# Altium PCB PCB1.PcbDoc
Units mil, origin at the board's own origin, x right, y up, seen from the top; angles counter-clockwise.
Board outline 5620.78 x 2570.78 mil, 2 copper layers (Top Layer, Bottom Layer), stack 21 mil thick; 57 components, 27 nets, 131 pads, 33 vias.
Unrouted connection lines stored in the file: 11.
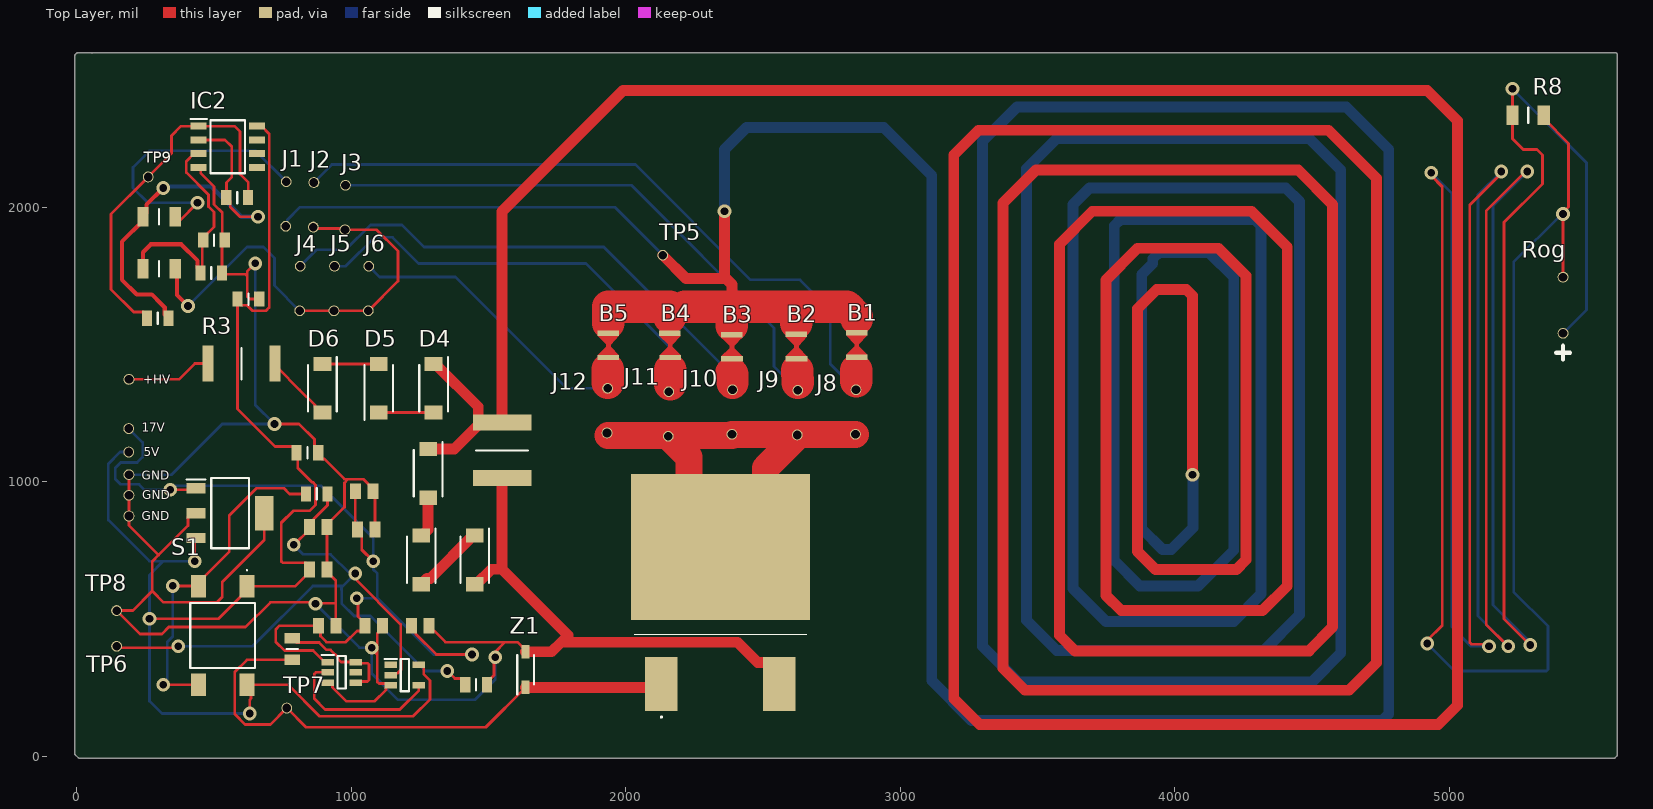
[diagram p0: Top Layer view]
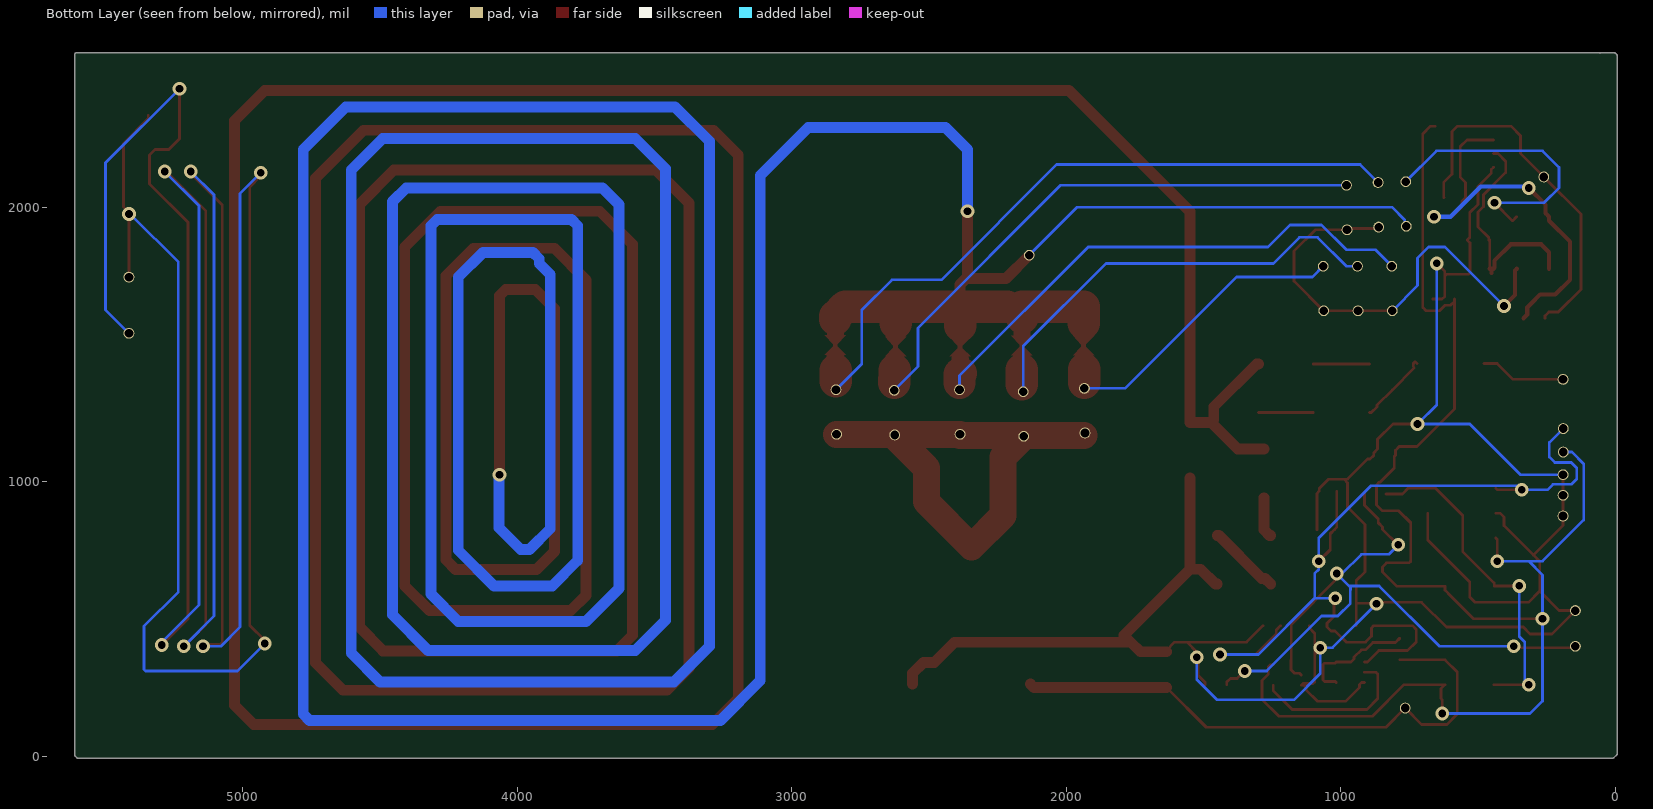
[diagram p1: Bottom Layer view, seen from below]
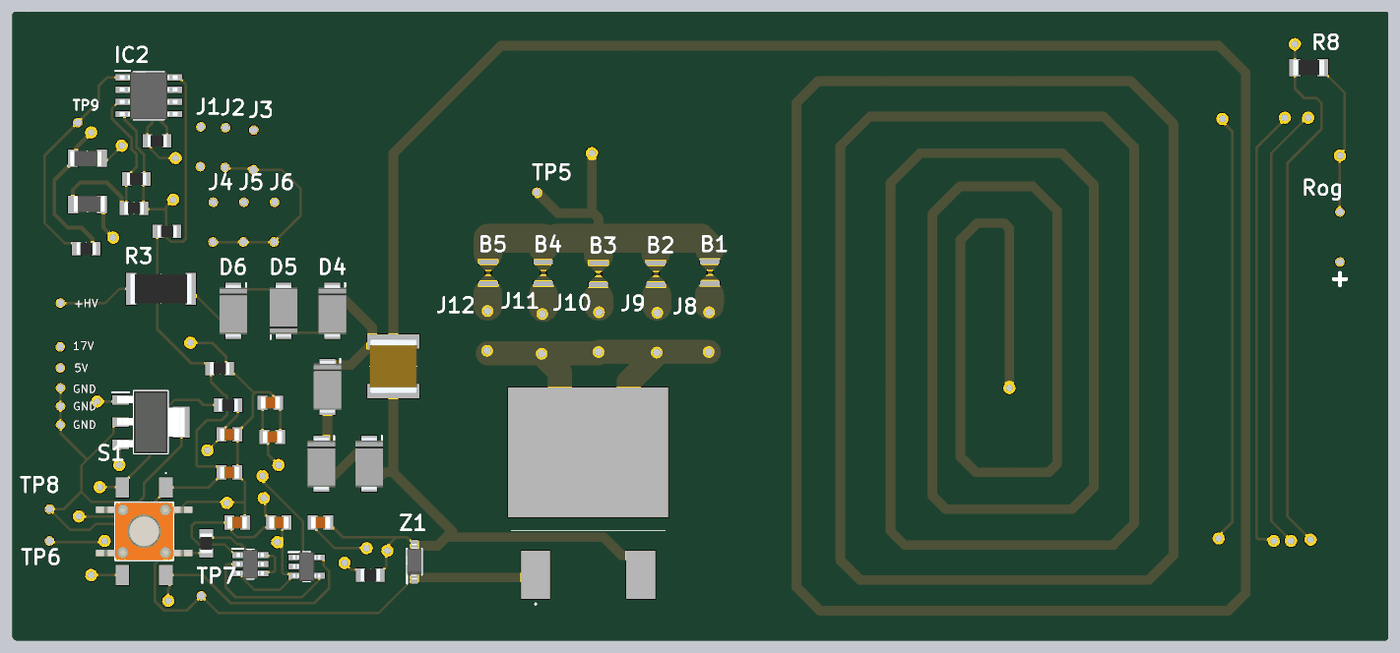
[diagram p2: 3D render of the assembled board from above, using the file's embedded part models]

## Layer stack, top to bottom
Top Solder: solder mask 0.4, Solder Resist, Dk 3.5
Top Layer: signal copper 1.4
Dielectric 2: prepreg 2.8, PP-006, Dk 4.1
Dielectric 1: dielectric 12.6, FR-4, Dk 4.8
Dielectric 3: prepreg 2.8, PP-006, Dk 4.1
Bottom Layer: signal copper 1.4
Bottom Solder: solder mask 0.4, Solder Resist, Dk 3.5

## Board outline
-5.58,4.42 cw(c0,10) -7.89,10 -7.89,2550 cw(c0,2550) -5.58,2555.58 -0.58,2560.58 cw(c5,2555) 5,2562.89 50,2562.89 cw(c50,2555) 55,2561.1 cw(c60,2555) 60,2562.89 5605,2562.89 cw(c5605,2555) 5612.89,2555 5612.89,5 cw(c5605,5) 5610.58,-0.58 5605.58,-5.58 cw(c5600,0) 5600,-7.89 10,-7.89 cw(c10,0) 4.42,-5.58

## Design rules (kind name [scope] priority, off if disabled: settings)
Clearance [All] p1: gap=10 ignorepadtopadclearanceinfootprint=FALSE except(0: Arc-Hole Track-Hole SMDPad-Hole THPad-Hole Via-Hole Fill-Hole Poly-Hole Region-Hole Text-Hole)
PolygonConnect [All] p1: connectstyle=Relief reliefconductorwidth=10 reliefentries=4 polygonreliefangle="90 Angle" airgapwidth=10
RoutingVias [All] p1: holewidth=28 width=50 viastyle="Through Hole" minholewidth=28 minwidth=50 maxholewidth=28 maxwidth=50
SolderMaskExpansion [All] p1: expansion=4 istentingtop=FALSE
Width [All] p1: maxlimit=157.48 minlimit=5.91 preferedwidth=10 minimp=50.000000 maximp=50.000000 favimp=50.000000
30 further rules are at their usual default settings.

## Classes and differential pairs
component class Sheet1: B1 B2 B3 B4 B5 D4 D5 D6 IC2 J1 J2 J3 J4 J5 J6 J8 J9 J10 J11 J12 R3 R8 S1 TP5 TP6 TP7 TP8 TP9 Z1

## Components (designator, comment, footprint, x,y, rotation, side; value= is the part's Value field where it differs from the comment)
B1 "200um_400um_35um" Bridge_2 2841.97,1496.34 r270 top
B2 "200um_400um_35um" Bridge_2 2621.97,1491.34 r270 top
B3 "200um_400um_35um" Bridge_2 2386.97,1490.28 r270 top
B4 "200um_400um_35um" Bridge_2 2161.97,1495.28 r270 top
B5 "200um_400um_35um" Bridge_2 1936.97,1495.28 r270 top
C1 "C0805C105J4RAC7210" RESC2012X60N 295,1595 r0 top
C2 "C0805C105J4RAC7210" RESC2012X60N 500,1880 r0 top
C3 "80-C2220X164KFRLCAUTO" CAPC5750X280N 1549.25,1113.82 r270 top
C4 "C0805C105J4RAC7210" RESC2012X60N 840,1105 r0 top
C5 "KAM21BR71H104JT" CAPC2012X94N 880,835 r0 top
C6 "C0805C105J4RAC7210" RESC2012X60N 625,1665 r0 top
C7 "KAM21BR71H104JT" CAPC2012X94N 1081.69,475 r0 top
C8 "KAM21BR71H104JT" CAPC2012X94N 1251.69,475 r0 top
C9 "KAM21BR71H104JT" CAPC2012X94N 911.69,475 r0 top
C10 "KAM21BR71H104JT" CAPC2012X94N 880,680 r0 top
C11 "KAM21BR71H104JT" CAPC2012X94N 1055,825 r0 top
C12 "KAM21BR71H104JT" CAPC2012X94N 1046.69,965 r0 top
D1 "AES2JF-HF" SODFL5226X110N 1450,715 r270 top
D2 "AES2JF-HF" SODFL5226X110N 1255,715 r270 top
D3 "AES2JF-HF" SODFL5226X110N 1280,1030 r270 top
D4 "AES2JF-HF" SODFL5226X110N 1300,1340 r270 top
D5 "AES2JF-HF" SODFL5226X110N 1100,1340 r90 top
D6 "AES2JF-HF" SODFL5226X110N 895,1340 r270 top
IC1 "ZXGD3005E6TA" SOT95P285X140-6N 965,305 r0 top
IC2 "AS2333S-13" SOIC127P600X150-8N 550,2220 r0 top
IC3 "74LVC1G17QW5-7" SOT95P285X140-5N 1195,295 r0 top
IC4 "UA78M05CDCYG3" SOT230P700X180-4N 559.02,885 r0 top
J1 "Jumper" Jumper 765,2015 r90 top
J2 "Jumper" Jumper 860,2005 r270 top
J3 "Jumper" Jumper 975,1995 r270 top
J4 "Jumper" Jumper 810,1700 r270 top
J5 "Jumper" Jumper 935,1700 r270 top
J6 "Jumper" Jumper 1060,1700 r270 top (schematic designator J7)
J8 "Jumper" Jumper 2835,1250 r270 top
J9 "Jumper" Jumper 2623.03,1247.76 r270 top
J10 "Jumper" Jumper 2385,1250 r270 top
J11 "Jumper" Jumper 2153.03,1242.76 r270 top
J12 "Jumper" Jumper 1930,1255 r270 top
P1 "Power Input" "Power Input" 190.98,1370.47 r0 top
Q1 "IXGT32N170-TRL" IXGT32N170TRL 2345,640 r0 top
R1 "RNCF0805BTE500K" RESC2012X60N 490,1760 r0 top
R2 "RNCF0805BTE500K" RESC2012X60N 584.37,2035 r180 top
R3 "HV733ATTE4702F" RESC6331X70N 600,1430 r0 top
R4 "ERJ-S06J3R0V" RESC2012X60N 785,390 r270 top
R5 "RNCE1206BTE49R9" RESC3216X60N 300,1775 r0 top
R6 "RNCE1206BTE49R9" RESC3216X60N 300,1965 r180 top
R7 "RNCF0805BTE500K" RESC2012X60N 874.37,955 r0 top
R8 "CRMA2010AF680RFKEF" RESC3216X65N 5287.91,2335 r0 top
R9 "RC0805FR-075M9L" RESC2012X60N 1455,260 r0 top
Rog "Rogowski" Rogowski 5415,1745.98 r0 top (schematic designator Rog1)
S1 "2-1977223-4" 219772234 531.42,439.13 r90 top
TP5 "Test_Point" TestPoint 2135,1825 r90 top
TP6 "Test_Point" TestPoint 145,400 r90 top
TP7 "Test_Point" TestPoint 765,175 r90 top
TP8 "Test_Point" TestPoint 145,530 r90 top
TP9 "Test_Point" TestPoint 260,2110 r90 top
Z1 "MMSZ4705-HE3_A-08" SOD3716X135N 1635,315 r90 top

## Footprints (in the part's own frame and the unit in brackets; to place one, negate y for a bottom-side part, rotate by r counter-clockwise, add the part's x,y. Pads: shape width x height; smd on the part's side, far side on the other; paste and mask are expansions set on the pad)
219772234 [mm]
  rect 2.1x1.4 smd: 1(4.55,-2.25) 2(-4.55,-2.25) 3(4.55,2.25) 4(-4.55,2.25)
  silkscreen extent -3,-3 6.1,3, body extent -3,-5 3,5, height 9.51
Bridge_2 [mm] "200umL_400umW_35umT"
  rect 0.5x2 smd: 1(-1.15,-0.025) 2(1.1,0)
  Top Layer region: 0.1,0.2 0.1,-0.2 -0.1,-0.2 -0.1,0.2
  Top Layer region: -0.1,0.2 -0.1,-0.2 -0.125,-0.2 -0.925,-1 -0.925,0.962
  Top Layer region: 0.1,-0.2 0.1,0.2 0.875,0.975 0.875,-0.975
CAPC2012X94N [mm]
  rect 1.02x1.47 smd: 1(-0.81,0) 2(0.81,0)
  body extent -1,-0.63 1,0.63, height 1.41
CAPC5750X280N [mm]
  rect 1.47x5.41 smd: 1(-2.57,0) 2(2.57,0)
  silkscreen extent 0,-2.4 0,2.4, body extent -2.85,-2.5 2.85,2.5, height 2.8
IXGT32N170TRL [mm]
  rect 3x5 smd: 1(-5.46,-9.6) 3(5.46,-9.6)
  rect 16.59x13.49 smd: 2(0,3.1)
  silkscreen extent -7.98,-12.7 7.98,-5
Jumper [mm]
  round 1 hole 0.8: 1(-2.15,0.1) 2(1.975,0.05)
"Power Input" [mm]
  round 1 hole 0.8: 1(-0.025,0.05) 2(-0.05,-4.5) 3(-0.05,-6.675) 4(-0.025,-8.775) 5(-0.025,-10.675) 6(-0.025,-12.6)
RESC2012X60N [mm]
  rect 0.95x1.4 smd: 1(-1,0) 2(1,0)
  silkscreen extent 0,-0.53 0,0.53, body extent -1,-0.63 1,0.63, height 0.6
RESC3216X60N [mm] "3216 (mm) resistor footprint"
  rect 1.05x1.8 smd: 1(-1.5,0) 2(1.5,0)
  silkscreen extent 0,-0.7 0,0.7, body extent -1.42,-0.74 1.78,0.86, height 0.55
RESC3216X65N [mm]
  rect 1.15x1.8 smd: 1(-1.45,0) 2(1.45,0)
  silkscreen extent 0,-0.7 0,0.7, body extent -1.6,-0.8 1.6,0.8, height 0.65
RESC6331X70N [mm]
  rect 1.05x3.3 smd: 1(-3.1,0) 2(3.1,0)
  silkscreen extent 0,-1.45 0,1.45, body extent -3.15,-1.55 3.15,1.55, height 0.7
Rogowski [mm]
  round 1 hole 0.8: 1(0,-0.025) 2(0,-5.225)
SOD3716X135N [mm]
  rect 1.25x0.75 smd: 1(-1.65,0) 2(1.65,0)
  silkscreen extent -2.27,-0.77 1.35,0.77, body extent -1.85,-0.77 1.85,0.77, height 1.35
SODFL5226X110N [mm]
  rect 1.32x1.64 smd: 1(-2.25,0) 2(2.25,0)
  silkscreen extent -2.91,-1.33 2.15,1.33, body extent -2.7,-1.43 2.7,1.43, height 1.1
SOIC127P600X150-8N [mm]
  rect 1.5x0.65 smd: 1(-2.7,1.905) 2(-2.7,0.635) 3(-2.7,-0.635) 4(-2.7,-1.905) 5(2.7,-1.905) 6(2.7,-0.635) 7(2.7,0.635) 8(2.7,1.905)
  silkscreen extent -3.45,-2.45 1.6,2.58, body extent -3,-2.45 3,2.45, height 1.5
SOT95P285X140-5N [mm]
  rect 1.15x0.6 smd: 1(-1.3,0.95) 2(-1.3,0) 3(-1.3,-0.95) 4(1.3,-0.95) 5(1.3,0.95)
  silkscreen extent -1.88,-1.5 0.38,1.5, body extent -1.43,-1.5 1.43,1.5, height 1.4
SOT95P285X140-6N [mm]
  rect 1.15x0.6 smd: 1(-1.3,0.95) 2(-1.3,0) 3(-1.3,-0.95) 4(1.3,-0.95) 5(1.3,0) 6(1.3,0.95)
  silkscreen extent -1.88,-1.5 0.38,1.6, body extent -1.43,-1.5 1.43,1.5, height 1.4
SOT230P700X180-4N [mm]
  rect 1.75x0.95 smd: 1(-3.15,2.3) 2(-3.15,0) 3(-3.15,-2.3)
  rect 1.75x3.2 smd: 4(3.15,0)
  silkscreen extent -4.03,-3.25 1.75,3.25, body extent -3.5,-3.25 3.5,3.25, height 1.68
TestPoint [mm]
  round 1 hole 0.8: 1(0,0)

## Part data
B1 B2 B3 B4 B5: library part Bridge_2
C1 C2 C4 C6: library part "1u 10V", "0805 Ceramic"
C3: "0.16uF / 1500V"
C5 C7 C8 C9 C10 C11 C12: "Capacitor", Manufacturer_Name="Kyocera AVX", Mouser Part Number=581-KAM21BR71H104JT, Arrow Part Number=KAM21BR71H104JT, Arrow Price/Stock=https://www.arrow.com/en/products/kam21br71h104jt/avx?utm_currency=USD&region=nac, Datasheet Link=https://spicat.kyocera-avx.com/product/mlcc/chartview/KAM21BR71H104JT/DataSheet/X7R, Height=0.94mm, Manufacturer_Part_Number=KAM21BR71H104JT, Mouser Price/Stock=https://www.mouser.co.uk/ProductDetail/KYOCERA-AVX/KAM21BR71H104JT?qs=Jm2GQyTW%2Fbic6Zk4McEt6w%3D%3D
D1 D2 D3 D4 D5 D6: "Diode", Manufacturer_Name="Comchip Technology", Mouser Part Number=750-AES2JF-HF, Arrow Part Number=AES2JF-HF, Arrow Price/Stock=https://www.arrow.com/en/products/aes2jf-hf/comchip-technology?region=nac, Datasheet Link=https://www.comchiptech.com/admin/files/product/20190826114642.PDF, Height=1.1mm, Manufacturer_Part_Number=AES2JF-HF, Mouser Price/Stock=https://www.mouser.co.uk/ProductDetail/Comchip-Technology/AES2JF-HF?qs=GBLSl2Akirug3Evn59Vm1Q%3D%3D
IC1: "Integrated Circuit", Manufacturer_Name="Diodes Incorporated", Mouser Part Number=522-ZXGD3005E6TA, Arrow Part Number=ZXGD3005E6TA, Arrow Price/Stock=https://www.arrow.com/en/products/zxgd3005e6ta/diodes-incorporated?region=nac, Datasheet Link=https://www.diodes.com//assets/Datasheets/ZXGD3005E6.pdf, Height=1.4mm, Manufacturer_Part_Number=ZXGD3005E6TA, Mouser Price/Stock=https://www.mouser.co.uk/ProductDetail/Diodes-Incorporated/ZXGD3005E6TA?qs=mM5ZU9tM8NelwnPGVh4qtQ%3D%3D
IC2: "Integrated Circuit", Manufacturer_Name="Diodes Incorporated", Mouser Part Number=621-AS2333S-13, Arrow Part Number=AS2333S-13, Arrow Price/Stock=https://www.arrow.com/en/products/as2333s-13/diodes-incorporated?utm_currency=USD&region=nac, Datasheet Link=https://www.diodes.com/assets/Datasheets/AS2333.pdf, Height=1.5mm, Manufacturer_Part_Number=AS2333S-13, Mouser Price/Stock=https://www.mouser.co.uk/ProductDetail/Diodes-Incorporated/AS2333S-13?qs=sPbYRqrBIVls8seEy2CWjg%3D%3D
IC3: "Integrated Circuit", Manufacturer_Name="Diodes Incorporated", Mouser Part Number=621-74LVC1G17QW5-7, Arrow Part Number=74LVC1G17QW5-7, Arrow Price/Stock=https://www.arrow.com/en/products/74lvc1g17qw5-7/diodes-incorporated?region=europe, Datasheet Link=https://www.diodes.com//assets/Datasheets/74LVC1G17Q.pdf, Height=1.4mm, Manufacturer_Part_Number=74LVC1G17QW5-7, Mouser Price/Stock=https://www.mouser.co.uk/ProductDetail/Diodes-Incorporated/74LVC1G17QW5-7?qs=sPbYRqrBIVng3b7ZXxamXA%3D%3D
IC4: "Integrated Circuit", Manufacturer_Name="Texas Instruments", Mouser Part Number=595-UA78M05CDCYG3, Arrow Part Number=UA78M05CDCYG3, Arrow Price/Stock=https://www.arrow.com/en/products/ua78m05cdcyg3/texas-instruments, Datasheet Link=https://www.ti.com/lit/ds/symlink/ua78m.pdf?ts=1600084265750&ref_url=https%253A%252F%252Fwww.google.com%252F, Height=1.8mm, Manufacturer_Part_Number=UA78M05CDCYG3, Mouser Price/Stock=https://www.mouser.co.uk/ProductDetail/Texas-Instruments/UA78M05CDCYG3?qs=0O%2FZFlpUpJW6iQLlsjczIw%3D%3D
Q1: "Transistor IGBT", Manufacturer_Name=LITTELFUSE, Mouser Part Number=747-IXGT32N170-TRL, Datasheet Link=http://ixapps.ixys.com/DataSheet/98941.pdf, Height=5.1mm, Manufacturer_Part_Number=IXGT32N170-TRL, Mouser Price/Stock=https://www.mouser.co.uk/ProductDetail/IXYS/IXGT32N170-TRL?qs=uwxL4vQweFPnCXDYRbLwWw%3D%3D
R1 R2 R7: library part "500k 0.1%"
R3: "47k 3kV 1W", Manufacturer_Name="KOA Speer", Datasheet Link=https://www.mouser.com/datasheet/2/219/HV73-11287.pdf, Height=0.7mm, Manufacturer_Part_Number=HV733ATTE4702F
R4: library part "3 Ohm Res", "3 Ohm 125mW 0805 (2012)"
R5 R6: library part "49.9 Ohm 0.1%"
R8: library part "680 Ohm 2kV", "500mW 1%"
R9: library part "5.9MOhm Res", "1% 1/8W"
S1: "Switch (4-Pin Push)", Manufacturer_Name="TE Connectivity", Mouser Part Number=506-2-1977223-4, Arrow Part Number=2-1977223-4, Arrow Price/Stock=https://www.arrow.com/en/products/2-1977223-4/te-connectivity?region=europe, Datasheet Link=https://www.te.com/en/product-2-1977223-4.html, Height=9.85mm, Manufacturer_Part_Number=2-1977223-4, Mouser Price/Stock=https://www.mouser.co.uk/ProductDetail/TE-Connectivity-Alcoswitch/2-1977223-4?qs=WwRK9Mn48WApgvYrqfKzDA%3D%3D
Z1: "18V Zener Diode", Manufacturer_Name=Vishay, Mouser Part Number=78-MMSZ4705-HE3_A-08, Datasheet Link=https://www.vishay.com/docs/86343/mmsz4681_to_mmsz4717.pdf, Height=1.35mm, Manufacturer_Part_Number=MMSZ4705-HE3_A-08, Mouser Price/Stock=https://www.mouser.co.uk/ProductDetail/Vishay/MMSZ4705-HE3_A-08?qs=Imq1NPwxi77ZSt3OXgfKjA%3D%3D

## Via types
v1: diameter 50, hole 28, Top Layer to Bottom Layer, 33 vias

## Nets (pads, with @x,y where several pads share a name; then routed paths per layer and width w, separated by ;. In a path a pad name is that pad's centre, name@x,y a point inside that pad or via, vN(x,y) a via of type N, cw(c..) or ccw(c..) an arc to the next point about the centre after c; other vN are vias at no path point)
5V: C4.1 C6.1 C10.1 IC2.8 IC3.5 IC4.3 P1.3 S1.1 S1.2 | length 5494.4
  Top Layer w10: v1(265,500) 515.51,500 597.44,581.93 620,604.49 S1.1 795.24,618.27 848.11,671.14 C10.1 848.11,688.86 833.03,703.94 750.86,703.94 745,709.79 745,850 788.56,893.56 848.56,893.56 870,915 870,987.47 859.91,997.56 857.44,997.56 805,1050 805,1091.77 800.63,1096.14 C4.1 800.63,1113.86 786.93,1127.56 722.44,1127.56 585.63,1264.37 C6.1@585.63,1656.14 ; v1(430,710) 430,789.45 IC4.3 ; C6.1 C6.1@585.63,1656.14 ; v1(630,155) 630,205 634.52,209.52 634.52,245.48 S1.2 770,260 885,145 1225,145 1286.72,206.72 1286.72,275.49 1263.82,298.39 1263.82,325.59 1257.01,332.4 IC3.5 ; IC2.8 673.03,2295 700.83,2267.2 700.83,1633.98 689.28,1622.44 639.46,1622.44 619.46,1642.44 599.33,1642.44 C6.1@585.63,1656.14
  Bottom Layer w10: P1.3 157.68,1107.68 115,1065 115,860 265,710 315,710 ; v1(430,710) 315,710 ; v1(630,155) 310,155 265,200 265,490 270,495 v1(265,500) 265,660 315,710
17V: C7.1 C8.1 C9.1 C11.1 C12.1 IC1.1 IC4.1 P1.2 | length 3488
  Top Layer w10: v1(340,970) 429.45,970 IC4.1 ; IC1.1 902.99,342.4 861.06,384.33 756.53,384.33 725,415.86 725,461.51 738.49,475 C9.1 888.08,466.72 888.08,436.92 910,415 980,415 1020.58,455.58 1034.72,455.58 1049.8,470.66 C7.1 1049.8,483.86 1024.72,508.94 1024.72,570.28 v1(1020,575) ; C12.1 1014.8,833.31 C11.1 1038.19,809.92 1038.19,751.81 v1(1080,710) ; C8.1 1234.88,459.92 1234.88,445.12 1310,370 v1(1440,370)
  Bottom Layer w10: P1.2 240,1142.32 240,1090 220,1070 160,1070 140,1050 140,1010 160,990 227.09,990 247.09,970 v1(340,970) 340,979.14 345.86,985 890,985 1080,795 v1(1080,710) 1080,680 1095,665 1095,575 ; v1(1020,575) 1095,575 ; v1(1440,370) 1300,370 1095,575
B1: B1.2 J2.1 J8.1
B2: B2.2 J3.1 J9.1
B3: B3.2 J4.1 J10.1 | length 1916.1
  Bottom Layer w10: J4.1 874.29,1845 980,1845 1070,1935 1185,1935 1265,1855 1920,1855 2388.94,1386.06 J10.1
B4: B4.2 J5.1 J11.1 | length 1591.7
  Bottom Layer w10: J5.1 979.65,1784.65 1085,1890 1150,1890 1245,1795 1855,1795 2156.97,1493.03 J11.1
B5: B5.2 J6.1 J12.1 | length 1144.3
  Top Layer w62.99: 1935,1410 B5.2@1935,1450
  Top Layer w118.11: 1935,1360 1935,1410
  Bottom Layer w10: J6.1 1103.58,1745 1380,1745 1785.35,1339.65 J12.1
GND: C2.2 C3.2 C4.2 C5.2 C6.2 C7.2 C8.2 C9.2 C10.2 C11.2 C12.2 D1.2 IC1.3 IC2.4 IC3.3 IC4.2 IC4.4 P1.4 P1.5 P1.6 Q1.3 R1.2 R9.2 TP8.1 Z1.2 | length 9518
  Top Layer w5.91: Z1.2 Z1.2@1635,384.88
  Top Layer w10: P1.4 P1.5 P1.6 190.28,874.13 190.28,839.72 298.09,731.91 ; IC4.2 419.25,885 405.55,871.3 405.55,839.36 298.09,731.91 ; IC2.4 444.14,2145 451.94,2137.2 451.94,2123.06 500,2075 500,2009.85 530,1979.85 530,1889.37 C2.2 529.37,1870 R1.2 534.24,1755.13 614.75,1755.13 620.61,1749.27 ; v1(650,1795) 620.61,1765.61 620.61,1749.27 ; C6.2 630.67,1665 620.61,1675.06 620.61,1749.27 ; IC4.4 683.03,787.52 530,634.49 530,580 510,560 315.86,560 275,600.86 ; v1(720,1210) 810,1210 865.67,1154.33 865.67,1118.7 C4.2 879.37,1096.14 893.07,1082.44 901.93,1082.44 975.43,1008.94 988.51,1008.94 ; v1(870,555) 865,560 705,560 615,470 335,470 310,445 230,445 TP8.1 204.14,530 275,600.86 ; v1@872.78,557.22 943.58,557.22 ; IC1.3 924.65,267.6 931.46,260.79 931.46,249.96 981.42,200 1085.5,200 1126.18,240.68 1126.18,250.79 1132.99,257.6 IC3.3 1137.01,264.41 1100.86,264.41 1095,270.27 1095,369.14 ; C9.2 943.58,557.22 ; v1(1075,395) 1075,389.14 1095,369.14 ; C11.2 1086.89,956.69 C12.2 1078.58,973.86 1043.5,1008.94 988.51,1008.94 ; C7.2 1113.58,466.14 1095,447.56 1095,369.14 ; C8.2 1343.58,415 1560,415 ; R9.2 1494.37,268.86 1520,294.49 1520,355 v1(1525,360) 1525,380 1560,415 ; Z1.2@1635,384.88 1635,385.24 1605.24,415 1560,415 ; 275,600.86 275,708.81 298.09,731.91 ; 943.58,557.22 943.58,639.45 911.89,671.14 C10.2 911.89,740.13 911.89,758.11 C5.2 911.89,843.86 975,906.97 975,995.43 988.51,1008.94
  Top Layer w39.37: D1.2 1456.3,626.42 1510.63,680.75 1549.25,680.75 ; C3.2 1549.25,680.75 ; Z1.2 1729.96,379.96 1765,415 ; Q1.3 2559.96,301.42 2520.59,340.79 2481.22,340.79 2407.01,415 1765,415 ; 1549.25,680.75 1790,440 1765,415
  Bottom Layer w10: P1.4 345,1025 530,1210 v1(720,1210) 650,1280 v1(650,1795) ; v1(870,555) 1030,395 v1(1075,395) 1075,300 1170,205 1450,205 1525,280 v1(1525,360)
NetB1_1: B1.1 B2.1 B3.1 B4.1 B5.1 C3.1 D3.1 D4.1 J1.1 TP5.1 | length 67403.8
  Top Layer w39.37: D3.1 1375.28,1118.58 C3.1@1471.69,1215 ; D4.1 1306.3,1428.58 1462.44,1272.44 1462.44,1224.25 C3.1@1471.69,1215 ; TP5.1 2220,1740 2355,1740 2360,1745 ; v1(2360,1985) 2360,1745 ; 2386.97,1637.4 2386.97,1718.03 2360,1745 ; v1(4065,1025) 4065,1676.94 4041.94,1700 3935,1700 3865,1630 3865,745 3930,680 4225,680 4260,715 4260,1750 4160,1850 3865,1850 3750,1735 3750,585 3805,530 4320,530 4410,620 4410,1855 4280,1985 3700,1985 3580,1865 3580,440 3636.94,383.06 4490,383.06 4490,385 4575,470 4575,2010 4450,2135 3495,2135 3375,2015 3375,320 3455,240 4635,240 4735,340 4735,2105 4560,2280 3285,2280 3195,2190 3195,210 3290,115 4960,115 5030,185 5030,2315 4920,2425 1990,2425 1549.25,1984.25 C3.1 C3.1@1471.69,1215
  Top Layer w62.99: 1935,1450 1936.97,1451.97 ; B4.1 2160.98,1596.42 ; 2161.97,1407.77 2161.97,1451.97 ; 2385,1395 2385,1445 2386.97,1446.97 ; B3.1 2386.97,1536.54 2386.97,1567.4 ; B2.1 2620.98,1576.42 ; 2621.97,1448.03 2626.97,1443.03 2625,1405 ; 2840,1405 2840,1451.06 2841.97,1453.03 ; B1.1 2840.98,1591.42
  Top Layer w66.93: B5.1 1935.98,1577.4
  Top Layer w118.11: 1935.98,1577.4 1935.98,1637.4 2160.98,1637.4 2160.98,1596.42 ; 2161.97,1355 2161.97,1407.77 ; 2215,1637.4 2386.97,1637.4 ; 2385,1395 2388.94,1391.06 2388.94,1360 ; 2386.97,1567.4 2386.97,1637.4 ; 2620.98,1576.42 2620.98,1637.4 ; 2625,1405 2626.22,1360.03 ; 2840,1365 2840,1405 ; 2840.98,1591.42 2840.98,1601.81 2805.39,1637.4 2620.98,1637.4 ; 2386.97,1637.4 2620.98,1637.4
  Bottom Layer w10: J1.1 766.68,1935.97 766.68,1953.75 812.93,2000 1960,2000 TP5.1 ; 863.94,2089.65 929.29,2155 2035,2155 2455,1735 2635,1735 2745,1625 2745,1428.58 2838.94,1334.65 ; 978.94,2079.65 2020.35,2079.65 2540,1560 2540,1419.37 2626.97,1332.4
  Bottom Layer w39.37: v1(2360,1985) 2360,2210 2440,2290 2940,2290 3115,2115 3115,275 3260,130 4756.94,130 4780,153.06 4780,2210 4625,2365 3425,2365 3300,2240 3300,400 3430,270 4500,270 4605,375 4605,2135 4490,2250 3570,2250 3460,2140 3460,495 3570,385 4325,385 4455,515 4455,2020 4405,2070 3690,2070 3630,2010 3630,610 3750,490 4215,490 4315,590 4315,600 4315,1931.94 4291.94,1955 3803.06,1955 3780,1931.94 3780,713.06 3873.06,620 4085,620 4215,750 4215,1745 4125,1835 3943.06,1835 3920,1811.94 3920,1795 3880,1755 3880,828.06 3955.22,752.84 3987.84,752.84 4067.03,832.03 4067.03,1022.97 v1(4065,1025)
NetC1_1: C1.1 IC2.1 R2.1 TP9.1 | length 1359.8
  Top Layer w10: C1.1 255.63,1603.86 241.93,1617.56 207.44,1617.56 125,1700 125,1975 255,2105 255,2110 TP9.1 345,2195 345,2260 380,2295 IC2.1 575,2295 595,2275 595,2120 625,2090 625,2035 R2.1
NetC1_2: C1.2 IC2.2 R2.2 R6.2 | length 1512.8
  Top Layer w10: IC2.2 540,2245 565,2220 565,2110 545,2090 R2.2 558.7,2021.3 558.7,2001.3 595,1965 v1(660,1965)
  Top Layer w15.75: v1(315,2070) 254.13,2009.13 254.13,1978.19 R6.2 240.94,1950.24 165,1874.29 165,1735 218.57,1681.43 273.57,1681.43 305,1650 320.67,1634.33 320.67,1608.7 C1.2
  Bottom Layer w15.75: v1(315,2070) 320,2075 490,2075 600,1965 v1(660,1965)
NetC2_1: C2.1 IC2.3 R1.1 R5.1 | length 862.7
  Top Layer w10: IC2.3 426.97,2195 399.17,2167.2 399.17,2125.99 480,2045.16 480,2001.57 500,1981.57 500,1928.23 460.63,1888.86 C2.1 ; R1.1@457.51,1775.9 C2.1@457.51,1880
  Top Layer w15.75: R5.1 240.94,1835.94 270,1865 380,1865 439.8,1805.2 439.8,1779.69 443.59,1775.9 R1.1@450.63,1775.9 ; R1.1 R1.1@450.63,1775.9 ; R1.1@457.51,1775.9 R1.1@450.63,1775.9
NetC5_1: C5.1 IC3.2 R7.2 R9.1 TP6.1 | length 2600.3
  Top Layer w10: TP6.1 150,395 365,395 v1(370,400) ; v1(790,770) 791.97,770 848.11,826.14 C5.1 863.19,850.08 863.19,863.19 913.74,913.74 R7.2 ; v1(1015,665) 1015,645 1180,480 1180,351.88 1181.46,350.43 1181.46,314.38 1168.89,301.81 1150.63,301.81 IC3.2 ; v1(1350,310) 1377.44,282.56 1401.93,282.56 1415.63,268.86 R9.1
  Bottom Layer w10: v1(370,400) 640,400 860,620 970,620 ; v1(790,770) 825,735 925,735 995,665 v1(1015,665) 970,620 ; v1(1350,310) 1270,310 1070,510 1010.86,510 965,555.86 965,605 964.14,605.86 964.14,614.14 970,620
NetD1_1: D1.1 D2.2 | length 268.4
  Top Layer w39.37: D2.2 1275.98,647.4 1287.52,647.4 1443.7,803.58 D1.1
NetD2_1: D2.1 D3.2 | length 150.5
  Top Layer w39.37: D2.1 1259.02,803.58 1280,824.57 D3.2
NetD4_2: D4.2 D5.1 | length 200
  Top Layer w10: D5.1 D4.2
NetD5_2: D5.2 D6.1 | length 205
  Top Layer w10: D6.1 D5.2
NetD6_2: D6.2 R3.2 | length 269.6
  Top Layer w10: R3.2 729.1,1437.06 735.12,1431.04 735.13,1430.84 735.84,1419.84 732.91,1413.51 812.07,1334.35 867.72,1278.7 867.72,1272.4 888.7,1251.42 D6.2
NetIC1_2: IC1.2 IC3.4 | length 584.9
  Top Layer w10: IC1.2 870.86,305 865,299.14 865,210 905,170 1176.54,170 1246.18,239.64 IC3.4
NetIC1_4: IC1.4 IC1.6 R4.1 | length 432.3
  Top Layer w10: R4.1 800.75,413.62 883.09,413.62 909.69,387.02 924.86,387.02 951.46,360.43 951.46,353.54 962.6,342.4 IC1.6 1020.06,338.52 1059.14,338.52 1065,332.66 1065,277.34 1059.14,271.48 1020.06,271.48 IC1.4
NetJ1_2: J1.2 R6.1 | length 1076.2
  Top Layer w10: R6.1 374.06,1950 v1(440,2015.94)
  Bottom Layer w10: v1(440,2015.94) 259.06,2015.94 205,2070 205,2145 265,2205 650.79,2205 J1.2
NetJ2_2: J2.2 J3.2 J4.2 J5.2 J6.2 R5.2 | length 1662.2
  Top Layer w10: J4.2 J5.2 J6.2 1170,1730.28 1170,1840 1092.76,1917.24 J3.2 971.97,1922.24 866.97,1922.24 J2.2
  Top Layer w15.75: R5.2 365,1769.06 365,1680 v1(405,1640)
  Bottom Layer w10: v1(405,1640) 620,1855 680,1855 720,1815 720,1714.21 J4.2
NetJ8_2: J8.2 J9.2 J10.2 J11.2 J12.2 Q1.2 | length 1912.6
  Top Layer w98.43: J12.2@1935,1167.24 2386.97,1167.24 J10.2 J8.2 ; J11.2 2230,1090 2230,877.05 Q1.2 2510,927.05 2510,1050 2625,1165 J9.2
NetP1_1: P1.1 R3.1 | length 311.8
  Top Layer w10: P1.1 372.44,1372.44 430,1430 R3.1
NetQ1_1: Q1.1 R4.2 TP7.1 Z1.1 | length 2069.9
  Top Layer w10: R4.2 620.52,350.63 575.63,305.74 575.63,152.8 613.43,115 705,115 TP7.1 765.54,175 835.54,105 1489.96,105 Z1.1
  Top Layer w39.37: Z1.1 2118.03,250.04 Q1.1
NetR7_1: R7.1 S1.3 S1.4 | length 1226.4
  Top Layer w10: v1(315,260) S1.4 ; v1(350,620) 441.1,620 441.1,630.32 555,744.21 555,875.62 655.24,975.86 754.79,975.86 775.65,955 R7.1
  Bottom Layer w10: v1(315,260) 330,275 330,416.57 350,436.57 v1(350,620)
NetR8_1: R8.1 R8.2 Rog.1 Rog.2 | length 17056.2
  Top Layer w10: v1(4920,410) 4920,420.82 4975,475.82 4975,2074.18 4935,2114.18 v1(4935,2125) ; v1(5145,400) 5137.35,407.65 5080.86,407.65 5075,413.51 5075,2008.43 5190,2123.43 v1(5190,2130) ; v1(5215,400) 5135,480 5135,1985.5 5275,2125.5 v1@5275,2132.07 ; v1(5230.83,2430.83) R8.1 5230.83,2249.17 5270,2210 5320,2210 5340,2190 5340,2085 5200,1945 5200,500 v1(5295,405) ; R8.2 5345,2322.2 5435,2232.2 5435,2000.86 5415,1980.86 v1(5415,1975) Rog.1 ; Rog.2@5409.57,1545.71 Rog.2
  Bottom Layer w10: v1(4920,410) 5020,310 5354.14,310 5360,315.86 5360,473.22 5235,598.22 5235,1800 v1@5405,1970 ; v1(4935,2125) 5010,2050 5010,470 5080,400 v1(5145,400) ; v1(5190,2130) 5105,2045 5105,510 v1(5215,400) ; v1(5230.83,2430.83) 5500,2161.65 5500,1625.28 Rog.2 ; v1(5285,2130) 5160,2005 5160,550.82 5295,415.82 v1(5295,405) ; v1(5415,1975) v1@5420,1970
pads on no net: IC1.5 IC2.5 IC2.6 IC2.7 IC3.1

## Silkscreen, mask and mechanical layers (free items; w line width, h text height)
Top Overlay:
  lines w15.75: 5390,1470 5440,1470 ; 5415,1445 5415,1495
Board Layout:
  lines w15.75: 50,2555 5,2555 0,2550 0,10 10,0 5600,0 5605,5 5605,2555 60,2555

## Text inside footprints (layer, text, board x,y; h text height)
P1: Top Overlay "GND" at 237.24,1006.3 h31.5; Top Overlay "5V" at 243.15,1091.93 h31.5; Top Overlay "17V" at 237.24,1182.48 h31.5; Top Overlay "+HV" at 242.17,1356.69 h31.5; Top Overlay "GND" at 238.23,935.43 h31.5; Top Overlay "GND" at 237.24,859.65 h31.5